# Altium PCB RF-UNIT-SPLIT.PcbDoc (part 1 of 2)
Units mm, origin at the board's own origin, x right, y up, seen from the top; angles counter-clockwise.
Board outline 99.88 x 99.9 mm, 2 copper layers (Top Layer, Bottom Layer), stack 1.671 mm thick; 85 components, 98 nets, 425 pads, 1878 vias.
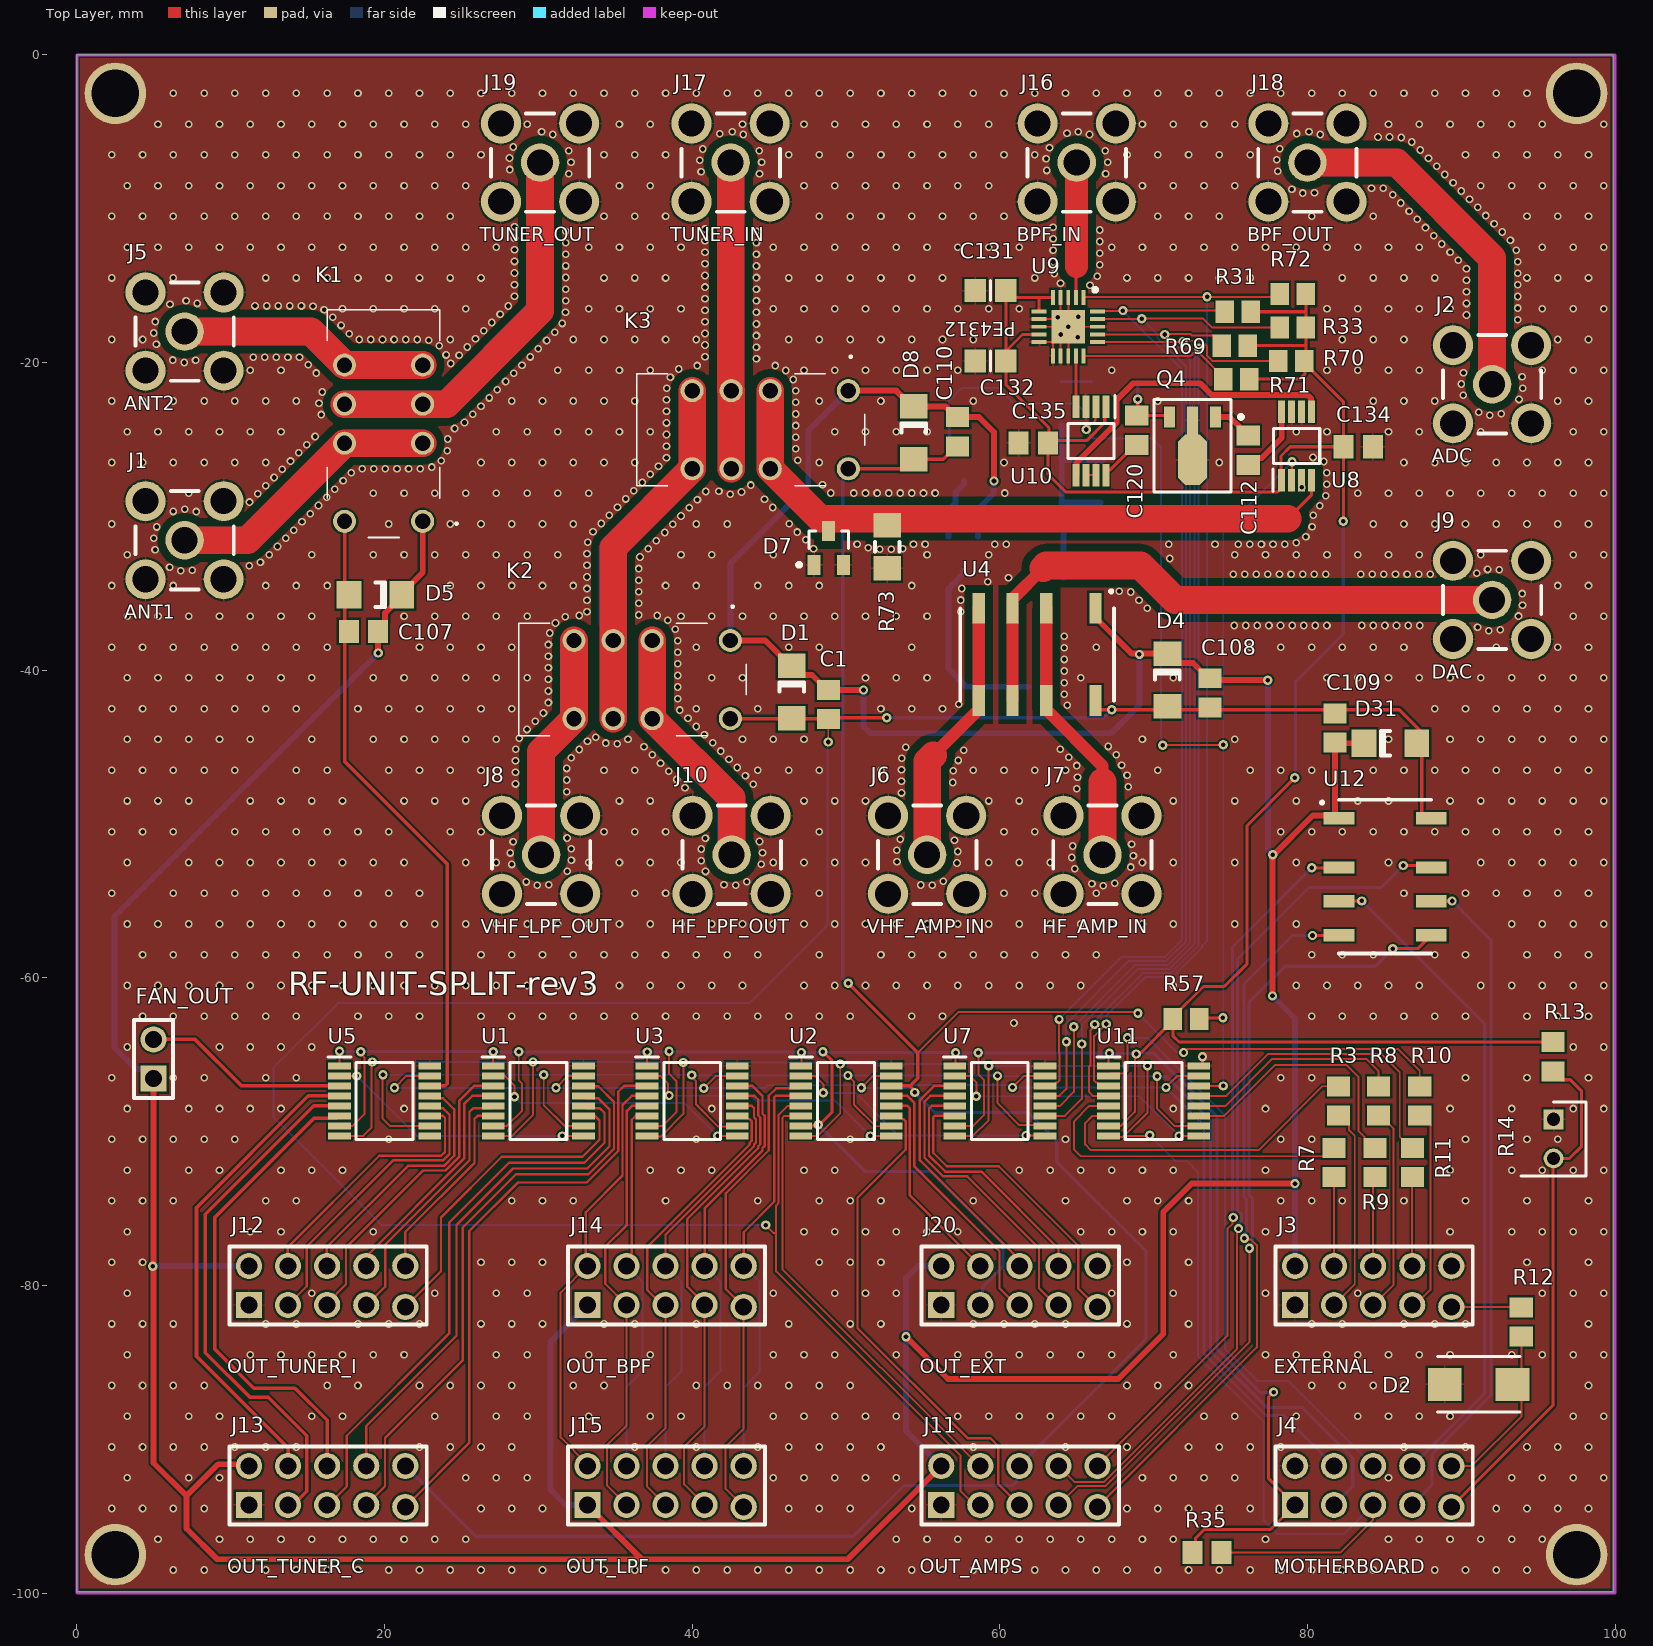
[diagram p0: Top Layer view]
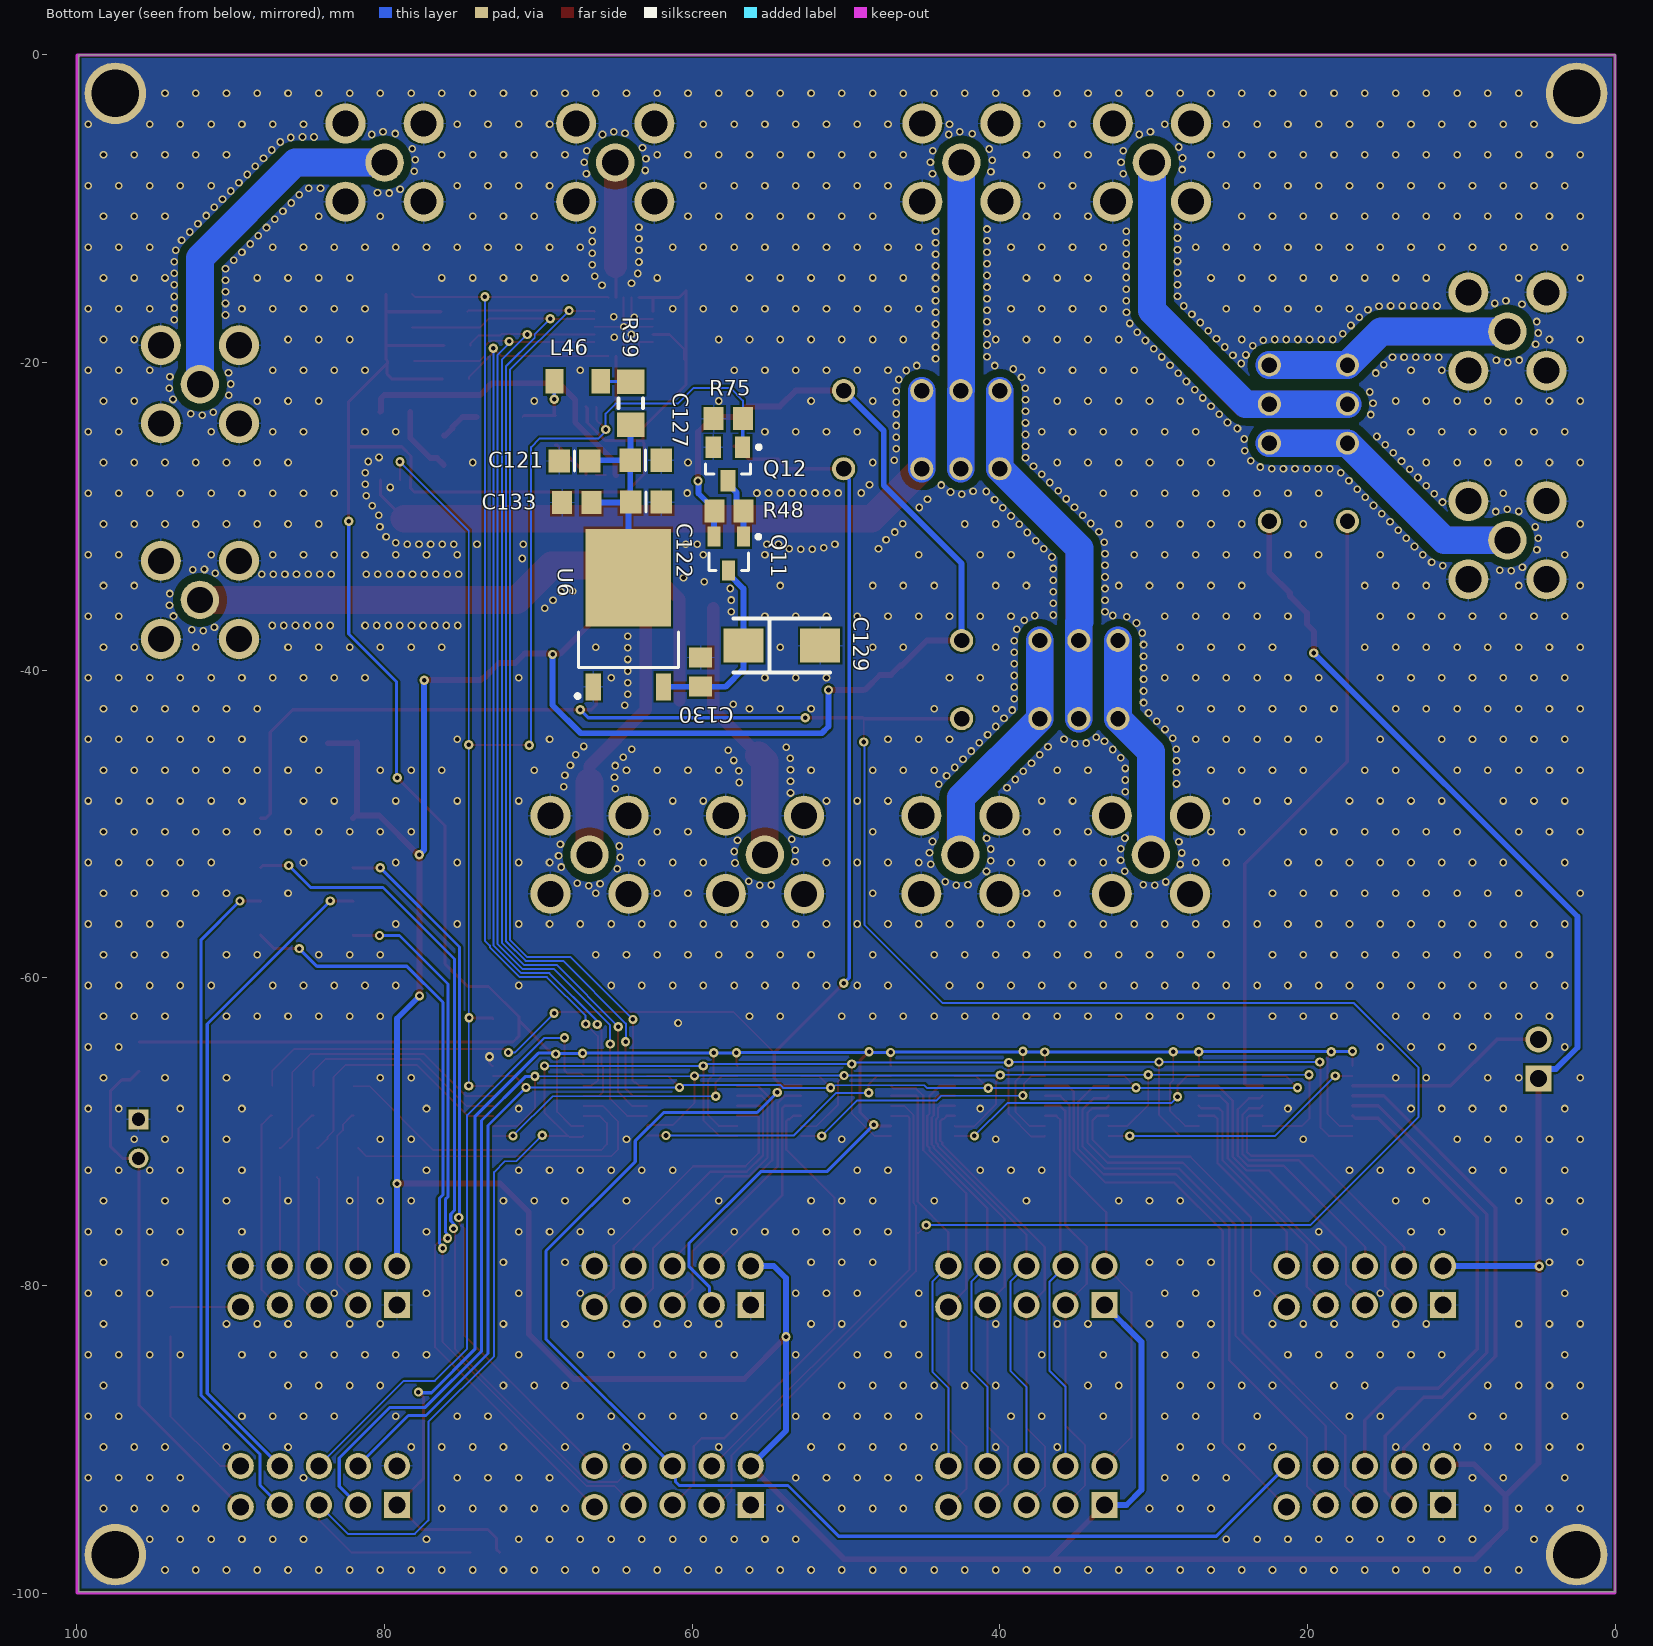
[diagram p1: Bottom Layer view, seen from below]

## Layer stack, top to bottom
Top Solder: solder mask 0.0102, Solder Resist, Dk 3.5
Top Layer: signal copper 0.0356
Dielectric 1: dielectric 1.6, FR-4, Dk 4.8
Bottom Layer: signal copper 0.0356
Bottom Solder: solder mask 0.0102, Solder Resist, Dk 3.5

## Board outline
0,-99.9 99.875,-99.9 99.875,0 0,0

## Design rules (kind name [scope] priority, off if disabled: settings)
BoardOutlineClearance [All] p1: gap=0.2 ignorepadtopadclearanceinfootprint=FALSE
Clearance Clearance-zazor [InNetClass('ZAZOR')] p1: gap=0.5 ignorepadtopadclearanceinfootprint=FALSE
Clearance [All] p2: gap=0.127 ignorepadtopadclearanceinfootprint=FALSE except(0.25: Arc-Hole Track-Hole SMDPad-Hole THPad-Hole Via-Hole Fill-Hole Poly-Hole Region-Hole Text-Hole)
ComponentClearance [All] p1: gap=0.127 collisioncheckmode=3 verticalgap=0.127 showdistances=TRUE
DiffPairsRouting [All] p1: maxlimit=0.254 minlimit=0.127 mostfreqgap=0.127 toplayer_minwidth=0.127 toplayer_maxwidth=25.4 toplayer_prefwidth=0.127 bottomlayer_minwidth=0.127 bottomlayer_maxwidth=25.4 bottomlayer_prefwidth=0.127 maxuncoupledlength=12.7
Height [All] p1: minheight=0 maxheight=1816.048 prefheight=12.7
HoleSize [All] p1: absolutevalues=TRUE maxlimit=6.3 minlimit=0.3 maxpercent=80.000 minpercent=20.000
HoleToHoleClearance [All] p1: gap=0.25 allowstackedmicrovias=FALSE
MinimumAnnularRing [All] p1: minimumring=0.076
MinimumSolderMaskSliver [All] p1: minsoldermaskwidth=0
PlaneClearance [All] p1: clearance=0.127
PlaneConnect PlaneConnectPowerPads [InPadClass('PowerPads')] p1: planeconnectstyle=Direct reliefexpansion=0.508 reliefentries=4 reliefconductorwidth=0.254 reliefairgap=0.254
PlaneConnect [All] p2: pad.planeconnectstyle=Relief pad.reliefexpansion=0.3 pad.reliefentries=4 pad.reliefconductorwidth=0.127 pad.reliefairgap=0.127 via.planeconnectstyle=Direct via.reliefexpansion=0.3 via.reliefentries=4 via.reliefconductorwidth=0.127 via.reliefairgap=0.127
PolygonConnect PolygonConnectPowerPads [All vs (InPadClass('PowerPads'))] p1: connectstyle=Direct reliefconductorwidth=0.254 reliefentries=4 polygonreliefangle="90 Angle" airgapwidth=0.254
PolygonConnect [All] p2: thpad.connectstyle=Relief thpad.reliefconductorwidth=0.127 thpad.reliefentries=4 thpad.polygonreliefangle="90 Angle" thpad.airgapwidth=0.127 smdpad.connectstyle=Relief smdpad.reliefconductorwidth=0.127 smdpad.reliefentries=4 smdpad.polygonreliefangle="90 Angle" smdpad.airgapwidth=0.127 via.connectstyle=Direct via.reliefconductorwidth=0.127 via.reliefentries=4 via.polygonreliefangle="90 Angle" via.airgapwidth=0.127
RoomDefinition U_CONTROL [InComponentClass('U_CONTROL')] p1: confinementstyle=ConfineIn formatcopy=TRUE lockcomponents=FALSE outline -57.729,-128.5 -6.929,-128.5 -6.929,-103.1 -57.729,-103.1
RoomDefinition U_CONN [InComponentClass('U_CONN')] p2: confinementstyle=ConfineIn formatcopy=TRUE lockcomponents=FALSE outline -57.729,-128.5 -6.929,-128.5 -6.929,-103.1 -57.729,-103.1
RoomDefinition U_LNA [InComponentClass('U_LNA')] p3: confinementstyle=ConfineIn formatcopy=TRUE lockcomponents=FALSE outline -57.729,-128.5 -6.929,-128.5 -6.929,-103.1 -57.729,-103.1
RoutingVias [All] p1: holewidth=0.3 width=0.6 viastyle="Through Hole" minholewidth=0.3 minwidth=0.6 maxholewidth=0.6 maxwidth=6.6
SilkToSilkClearance [All] p1: silktosilkclearance=0
SilkToSolderMaskClearance [IsPad] p1: minsilkscreentomaskgap=0.127 clearancetoexposedcopper=TRUE
SolderMaskExpansion [All] p1: expansion=0.075 istentingtop=FALSE
Width [All] p1: maxlimit=25.4 minlimit=0.127 preferedwidth=0.127 minimp=50.000000 maximp=50.000000 favimp=50.000000
20 further rules are at their usual default settings.

## Classes and differential pairs
net class Zazor: ADC ANT_OUT NetJ1_5 NetJ5_5 NetJ6_5 NetJ7_5 NetJ8_5 NetJ9_5 NetJ10_5 RX_ATT_OUT RX_IN_LNA TUNER TX_AMP_OUT
component class U_LNA: C110 C112 C120 C121 C122 C127 C129 C130 C131 C132 C133 C134 C135 D7 D8 J16 J17 J18 J19 K3 L46 Q4 Q11 Q12 R39 R48 R73 R75 U6 U8 U9 U10
component class U_CONTROL: C1 D1 FAN_OUT J8 J10 J11 J12 J13 J14 J15 J20 K2 R13 R14 R31 R33 R35 R57 R69 R70 R71 R72 U1 U2 U3 U5 U7 U11
component class U_CONN: C107 C108 C109 D2 D4 D5 D31 J1 J2 J3 J4 J5 J6 J7 J9 K1 R3 R7 R8 R9 R10 R11 R12 U4 U12

## Components (designator, comment, footprint, x,y, rotation, side; value= is the part's Value field where it differs from the comment)
C1 "100n" CAP_0805 48.85,-42.425 r90 top
C107 "100n" CAP_0805 18.425,-37.475 r0 top
C108 "100n" CAP_0805 73.65,-41.675 r90 top
C109 "100n" CAP_0805 81.8,-43.55 r270 top
C110 "100n" CAP_0805 57.25,-24.7 r90 top
C112 "1n" CAP_0805 76.15,-25.5 r270 top
C120 "1n" CAP_0805 68.9,-24.6 r90 top
C121 "10n" 6-0805_M 67.652,-26.4 r180 bottom
C122 "1n" 6-0805_M 63,-29.08 r0 bottom
C127 "100p" 6-0805_M 63.025,-26.352 r0 bottom
C129 "10uF 25V" CAPAE_5.3x5.3h6.1 54.175,-38.4 r180 bottom
C130 "100n" CAP_0805 59.45,-39.925 r270 bottom
C131 "100n" 6-0805_M 59.398,-15.325 r0 top
C132 "100p" 6-0805_M 59.398,-19.9 r0 top
C133 "100n" CAP_0805 67.7,-29.1 r180 bottom
C134 "100n" CAP_0805 83.5,-25.475 r180 top
C135 "100n" CAP_0805 61.975,-25.225 r0 top
D1 "1N4148" SS14 46.475,-41.1 r270 top
D2 "SMAJ5.0A-TR" SMBJ36CATR 91.125,-86.427 r180 top
D4 "1N4148" SS14 70.9,-40.325 r270 top
D5 "1N4148" SS14 19.725,-35.1 r180 top
D7 "BAV99" SOT23 48.875,-32.05 r0 top
D8 "1N4148" SS14 54.4,-24.25 r270 top
D31 "1N4148" SS14 85.075,-44.75 r0 top
FAN_OUT "51022-0200" 51022-0200 4.35,-65.275 r90 top
J1 "ANT1" 31-5431 7,-31.55 r0 top
J2 "ADC" 31-5431 92,-21.415 r0 top
J3 "EXTERNAL" 90131-0126 83,-80 r0 top
J4 "MOTHERBOARD" 90131-0126 83,-93 r0 top
J5 "ANT2" 31-5431 7,-17.985 r0 top
J6 "VHF_AMP_IN" 31-5431 55.275,-52 r0 top
J7 "HF_AMP_IN" 31-5431 66.675,-52 r0 top
J8 "VHF_LPF_OUT" 31-5431 30.175,-52 r0 top
J9 "DAC" 31-5431 92,-35.435 r0 top
J10 "HF_LPF_OUT" 31-5431 42.565,-52 r0 top
J11 "OUT_AMPS" 90131-0126 60,-93 r0 top
J12 "OUT_TUNER_I" 90131-0126 15,-80 r0 top
J13 "OUT_TUNER_C" 90131-0126 15,-93 r0 top
J14 "OUT_BPF" 90131-0126 37,-80 r0 top
J15 "OUT_LPF" 90131-0126 37,-93 r0 top
J16 "BPF_IN" 31-5431 65,-7 r0 top
J17 "TUNER_IN" 31-5431 42.5,-7 r0 top
J18 "BPF_OUT" 31-5431 80,-7 r0 top
J19 "TUNER_OUT" 31-5431 30.11,-7 r0 top
J20 "OUT_EXT" 90131-0126 60,-80 r0 top
K1 "G6S-2-DC12" G6S2DC12#1 22.48,-30.325 r90 top
K2 "G6S-2-DC12" G6S2DC12#2 42.48,-38.07 r180 top
K3 "G6S-2-DC12" G6S2DC12#2 50.155,-21.825 r180 top
L46 "220nH" IND_1206 67.45,-21.225 r0 bottom
Q4 "PGA-103+ / SPF5189Z" SOT89 72.525,-24.925 r180 top
Q11 "IRLML9301" SOT23 57.625,-32.425 r0 bottom
Q12 "BSS123" FAIR-SOT23-3_V 57.675,-26.6 r0 bottom
R3 "560" RES_0805 82.025,-68 r90 top
R7 "560" RES_0805 81.725,-72 r90 top
R8 "560" RES_0805 84.625,-68 r90 top
R9 "560" RES_0805 84.4,-72 r90 top
R10 "560" RES_0805 87.3,-68 r90 top
R11 "560" RES_0805 86.825,-72 r90 top
R12 "560" RES_0805 93.9,-82.375 r270 top
R13 "2k" RES_0805 95.975,-65.125 r90 top
R14 "KTY81/120" TO254P420X460X770-2P 96,-69.2 r270 top
R31 "1k" RESC2013X60X40NL20T25 75.475,-16.7 r0 top
R33 "1k" RESC2013X60X40NL20T25 79.052,-17.725 r0 top
R35 "1k" RES_0805 73.475,-97.35 r0 top
R39 "18" RES_1206 64,-22.65 r90 bottom
R48 "30k" RES_0805 57.6,-29.648 r0 bottom
R57 "1k" RESC2013X60X40NL20T25 72.1,-62.675 r180 top
R69 "1k" RESC2013X60X40NL20T25 75.275,-18.9 r0 top
R70 "1k" RESC2013X60X40NL20T25 78.95,-19.902 r0 top
R71 "1k" RESC2013X60X40NL20T25 75.373,-21.077 r0 top
R72 "1k" RESC2013X60X40NL20T25 79.052,-15.548 r0 top
R73 "10k" RES_1206 52.675,-31.975 r90 top
R75 "30k" RES_0805 57.65,-23.65 r180 bottom
U1 "STPIC6C595TTR" SOP65P640X120-16N#1 30,-68 r0 top
U2 "STPIC6C595TTR" SOP65P640X120-16N#1 50,-68 r0 top
U3 "STPIC6C595TTR" SOP65P640X120-16N#1 40,-68 r0 top
U4 "Axicom IM06" IM06GR 62.425,-38.975 r180 top
U5 "STPIC6C595TTR" SOP65P640X120-16N#2 20,-68 r0 top
U6 "LM1117DT-5.0" TO228P991X238-3N 64.15,-36.382 r90 bottom
U7 "STPIC6C595TTR" SOP65P640X120-16N#1 60,-68 r0 top
U8 "ADG918BRMZ" SOP65P490X110-8N 79.3,-25.425 r90 top
U9 "PE4312" QFN50P400X400X90-21N 64.45,-17.675 r270 top
U10 "ADG918BRMZ" SOP65P490X110-8N 65.925,-25.1 r270 top
U11 "STPIC6C595TTR" SOP65P640X120-16N#1 70,-68 r0 top
U12 "Axicom IM06" IM06GR 85.05,-53.425 r270 top

## Footprints (in the part's own frame and the unit in brackets; to place one, negate y for a bottom-side part, rotate by r counter-clockwise, add the part's x,y. Pads: shape width x height; smd on the part's side, far side on the other; paste and mask are expansions set on the pad)
6-0805_M [mm] "Chip Resistor, Body 2.0x1.2mm, IPC Low Density"
  rect 1.4x1.5 smd: 1(-1,0) 2(1,0)
  silkscreen extent 0,-0.65 0,0.65, body extent -1.07,-0.7 1.07,0.7, height 0.7
31-5431 [mm]
  round 2.6 hole 1.7: 1(-2.54,-2.54) 2(2.54,-2.54) 3(2.54,2.54) 4(-2.54,2.54)
  round 2.5 hole 1.7: 5(0,0)
  silkscreen extent -3.2,-3.2 3.2,3.2
51022-0200 [mm]
  rect 1.7x1.7 hole 1.1: 1(-1.27,-0.635)
  round 1.7 hole 1.1: 2(1.27,-0.635)
  silkscreen extent -2.54,-1.91 2.54,0.64
90131-0126 [mm]
  rect 1.7x1.7 hole 1.1: 1(-3.81,-1.27)
  round 1.7 hole 1.1: 2(-3.81,1.27) 3(-1.27,-1.27) 4(-1.27,1.27) 5(1.27,-1.27) 6(1.27,1.27) 7(3.81,-1.27) 8(3.81,1.27) 9(6.35,-1.397) 10(6.35,1.27)
  silkscreen extent -5.08,-2.54 7.75,2.54
CAP_0805 [mm]
  rect 1.3x1.5 smd: 1(-0.75,0) 2(1.15,0)
CAPAE_5.3x5.3h6.1 [mm]
  rect 2.6x2.2 smd: 1(-2.5,0) 2(2.5,0)
  silkscreen extent -3.15,-1.75 3.15,1.75
FAIR-SOT23-3_V [mm] "SOT23, 3-Leads, Body 2.92x1.3mm, Pitch 0.95mm"
  rect 1x1.4 smd: 1(-0.95,-1.1) 2(0.95,-1.1) 3(0,1.1)
  silkscreen extent -2.12,-1.22 1.46,0.65, body extent -1.46,-0.65 1.46,0.65, height 1.2
G6S2DC12#1 [mm]
  round 1.5 hole 1: 1(0,0) 3(5.08,0) 4(7.62,0) 5(10.16,0) 8(10.16,5.08) 9(7.62,5.08) 10(5.08,5.08)
  round 1.5 hole 1 mask+0.075: 12(0,5.08)
  silkscreen extent -1.05,-2.25 13.75,6.19, body extent -1.05,-1.11 13.75,6.19, height 9.5
G6S2DC12#2 [mm]
  round 1.5 hole 1: 1(0,0) 3(5.08,0) 4(7.62,0) 5(10.16,0) 8(10.16,5.08) 9(7.62,5.08) 10(5.08,5.08) 12(0,5.08)
  silkscreen extent -1.05,-2.25 13.75,6.19, body extent -1.05,-1.11 13.75,6.19, height 9.5
IM06GR [mm]
  rect 0.8x2 smd: 1(-3.8,-3) 2(-0.6,-3) 3(1.6,-3) 4(3.8,-3) 5(3.8,3) 6(1.6,3) 7(-0.6,3) 8(-3.8,3)
  silkscreen extent -5,-4.17 5,3
IND_1206 [mm]
  rect 1.2x1.6 smd: 1(-1.5,0) 2(1.5,0)
QFN50P400X400X90-21N [mm]
  rect 1x0.25 smd: 1(-1.9,1) 2(-1.9,0.5) 3(-1.9,0) 4(-1.9,-0.5) 5(-1.9,-1) 11(1.9,-1) 12(1.9,-0.5) 13(1.9,0) 14(1.9,0.5) 15(1.9,1)
  rect 0.25x1 smd: 6(-1,-1.9) 7(-0.5,-1.9) 8(0,-1.9) 9(0.5,-1.9) 10(1,-1.9) 16(1,1.9) 17(0.5,1.9) 18(0,1.9) 19(-0.5,1.9) 20(-1,1.9)
  rect 2.2x2.2 smd: 21(0,0)
  silkscreen extent -2.52,1.63 -2.28,1.88, body extent -2.05,-2.05 2.05,2.05, height 0.9
RES_0805 [mm]
  rect 1.3x1.5 smd: 1(-0.95,0) 2(0.95,0)
RES_1206 [mm]
  rect 1.6x1.8 smd: 1(-1.4,0) 2(1.4,0)
  silkscreen extent -0.3,-0.8 0.3,0.8
RESC2013X60X40NL20T25 [mm] "Chip Resistor, 2-Leads, Body 2.00x1.25mm, IPC Medium Density"
  rect 1.2x1.45 smd: 1(-0.85,0) 2(0.85,0)
  body extent -1.1,-0.72 1.1,0.72, height 0.6
SMBJ36CATR [mm]
  rect 2.2x2.15 smd: 1(-2.2,0) 2(2.2,0)
  silkscreen extent -2.68,-1.81 2.67,1.81, body extent -3.08,-1.81 3.09,1.81, height 2.75
SOP65P490X110-8N [mm]
  rect 1.45x0.45 smd: 1(-2.225,0.975) 2(-2.225,0.325) 3(-2.225,-0.325) 4(-2.225,-0.975) 5(2.225,-0.975) 6(2.225,-0.325) 7(2.225,0.325) 8(2.225,0.975)
  silkscreen extent -2.95,-1.5 1.15,1.55, body extent -2.45,-1.5 2.45,1.5, height 1.1
SOP65P640X120-16N#1 [mm]
  rect 1.48x0.45 smd: 1(-2.935,2.275) 2(-2.935,1.625) 3(-2.935,0.975) 4(-2.935,0.325) 5(-2.935,-0.325) 6(-2.935,-0.975) 7(-2.935,-1.625) 8(-2.935,-2.275) 9(2.935,-2.275) 10(2.935,-1.625) 11(2.935,-0.975) 12(2.935,-0.325) 13(2.935,0.325) 14(2.935,0.975) 15(2.935,1.625) 16(2.935,2.275)
  silkscreen extent -3.67,-2.5 1.85,2.85, body extent -3.2,-2.5 3.2,2.5, height 1.2
SOP65P640X120-16N#2 [mm]
  rect 1.48x0.45 smd: 1(-2.935,2.275) 2(-2.935,1.625) 3(-2.935,0.975) 4(-2.935,0.325) 5(-2.935,-0.325) 6(-2.935,-0.975) 7(-2.935,-1.625) 8(-2.935,-2.275) 9(2.935,-2.275) 10(2.935,-1.625) 11(2.935,-0.975) 12(2.935,-0.325) 14(2.935,0.975) 15(2.935,1.625) 16(2.935,2.275)
  rect 1.48x0.45 smd mask+0.075: 13(2.935,0.325)
  silkscreen extent -3.67,-2.5 1.85,2.85, body extent -3.2,-2.5 3.2,2.5, height 1.2
SOT23 [mm] "SOT-23; 3 Leads; Body 3.0 x 2.6 mm, inc. leads (LxW max)"
  rect 0.85x1.3 smd: 1(-0.95,-1.1) 2(0.95,-1.1) 3(0,1.1)
  silkscreen extent -2.05,-1.22 1.28,1.1
SOT89 [mm] "SOT-89; Body 4.6 x 4.25 mm, inc. leads (LxW max)"
  oct 1.9x3.3 smd: 0(0,1.388)
  rect 0.7x1.35 smd: 1(-1.5,-1.388) 3(1.5,-1.388)
  rect 0.7x1.8 smd: 2(0,-1.162)
  silkscreen extent -3.28,-2.51 2.5,3.49
SS14 [mm]
  rect 1.6x1.8 smd: 1(-1.4,0) 2(2.032,0)
  silkscreen extent -0.3,-0.8 0.3,0.8
TO228P991X238-3N [mm]
  rect 1.75x1 smd: 1(-4.7,2.285) 3(-4.7,-2.285)
  rect 6.35x5.55 smd: 4(2.4,0)
  silkscreen extent -5.42,-3.25 -1.15,3.43
TO254P420X460X770-2P [mm]
  rect 1.29x1.29 hole 0.86: 1(0,0)
  round 1.29 hole 0.86: 2(2.54,0)
  silkscreen extent -1.13,-2.1 3.67,2.1, body extent -1.03,-2.1 3.57,2.1, height 7.6

## Part data
C1 C107 C108 C109 C110 C112 C120 C121 C122 C127 C130 C131 C132 C133 C134 C135: library part CAP_0805, "CAP_0805"
C129: library part CAPAE_5.3x5.3h6.1, "CAPAE_5.3x5.3h6.1"
D2: library part SMLVT3V3, "Diode", Manufacturer_Name=STMicroelectronics, Mouser Part Number=511-SMLVT3V3, RS Part Number=5444821P, Allied_Number=70013736, Allied Price/Stock=http://www.alliedelec.com/stmicroelectronics-smlvt3v3/70013736/, Datasheet Link=http://www.st.com/web/en/resource/technical/document/datasheet/CD00000923.pdf, Height=2.65mm, Manufacturer_Part_Number=SMLVT3V3, Mouser Price/Stock=https://www.mouser.com/Search/Refine.aspx?Keyword=511-SMLVT3V3, RS Price/Stock=http://uk.rs-online.com/web/p/products/5444821P
J1 J2 J5 J6 J7 J8 J9 J10 J16 J17 J18 J19: library part 31-5431, "SMA"
J3 J4: library part 90131-0126, "2*5 PIN"
J11 J12 J13 J14 J15 J20: library part 90131-0126_1_1, "2*5 PIN"
K1 K2 K3: "Relay or Contactor", Manufacturer_Name="Omron Electronics", Mouser Part Number=653-G6S-2-DC12A, Datasheet Link=https://componentsearchengine.com/Datasheets/1/G6S-2-DC12.pdf, Height=9.4mm, Manufacturer_Part_Number=G6S-2-DC12, Mouser Price/Stock=https://www.mouser.co.uk/ProductDetail/Omron-Electronics/G6S-2-DC12/?qs=QGk6feVlqMLN9Ouv0QsFzA%3D%3D
L46: library part IND_1206, "IND_1206"
Q4: library part PGA-103+
Q11: library part MOSFET_ENH_PD, "MOSFET"
Q12: library part CMP-2000-04934-1, "N-Channel Logic Level Enhancement Mode Field Effect Transistor, 1.7 V, -55 to 150 degC, 3-Pin SOT-23, RoHS, Tape and Reel", Manufacturer=Fairchild, Maximum Continuous Drain Current=0.17A, Maximum Drain Source Voltage=100V, Maximum Gate Source Voltage=±20V, Operating Temperature=-55to150degC, Package=3SOT-23, Package Description="3-Pin Small Outline Transistor, Body 2.92 x 1.325 mm, Pitch 0.95 mm", Package Reference=SOT23-3, Package Version="Rev. 12, 03/2016", Category=MOSFET, Channel Mode=Enhancement, Channel Type=N, Datasheet URL=https://www.fairchildsemi.com/datasheets/BS/BSS123.pdf, Datasheet Version=Jun-03, Manufacturer URL=https://www.fairchildsemi.com/, Mounting=SurfaceMount, Package URL=http://www.fairchildsemi.com/dwg/MA/MA03D.pdf, Packaging=Tape&Reel, Rad Hard=No, RDS-on=6000@10VmOhm, Typical Fall Time=2.4ns, Typical Rise Time=9ns, Typical Turn-Off Delay Time=17ns, Typical Turn-On Delay Time=1.7ns
R3 R7 R8 R9 R10 R11 R12 R13 R35 R48 R75: library part RES_0805, "RES_0805"
R14: library part KTY81_110, "Integrated Circuit", Manufacturer_Name=Nexperia, Manufacturer_Part_Number=KTY81/110, Datasheet Link=https://www.nxp.com/docs/en/data-sheet/KTY81_SER.pdf, Height=4.2mm
R31 R33 R57 R69 R70 R71 R72: library part CMP-2001-00626-1, "RES_0805", Manufacturer=Panasonic, Part Number=ERA-6AEB303V
R39 R73: library part RES_1206, "RES_1206"
U1 U2 U3 U5 U7 U11: "Integrated Circuit", Manufacturer_Name=STMicroelectronics, Mouser Part Number=511-STPIC6C595T, Arrow Part Number=STPIC6C595TTR, Arrow Price/Stock=https://www.arrow.com/en/products/stpic6c595ttr/stmicroelectronics, Datasheet Link=http://www.st.com/st-web-ui/static/active/en/resource/technical/document/datasheet/CD00020664.pdf, Height=1.2mm, Manufacturer_Part_Number=STPIC6C595TTR, Mouser Price/Stock=https://www.mouser.co.uk/ProductDetail/STMicroelectronics/STPIC6C595TTR?qs=Pgvhs884FskRYYZkj3y%2FSg%3D%3D
U6: library part LM1117DT-ADJ, "Integrated Circuit", Manufacturer_Name="Texas Instruments", Mouser Part Number=926-LM1117DT-ADJ, Datasheet Link=http://www.ti.com/lit/ds/symlink/lm1117-n.pdf, Height=2.38mm, Manufacturer_Part_Number=LM1117DT-ADJ, Mouser Price/Stock=https://www.mouser.com/Search/Refine.aspx?Keyword=926-LM1117DT-ADJ
U8 U10: "Integrated Circuit", Manufacturer_Name="Analog Devices", Mouser Part Number=584-ADG918BRMZ, RS Part Number=4969212P, Datasheet Link=http://www.analog.com/static/imported-files/data_sheets/ADG918_919.pdf, Height=1.1mm, Manufacturer_Part_Number=ADG918BRMZ, Mouser Price/Stock=https://www.mouser.co.uk/ProductDetail/Analog-Devices/ADG918BRMZ?qs=BpaRKvA4VqHrp1TCwMhfnw%3D%3D, RS Price/Stock=http://uk.rs-online.com/web/p/products/4969212P
U9: library part PE4312C-Z, "Integrated Circuit", Manufacturer_Name=pSemi, Mouser Part Number=N/A, Datasheet Link=https://www.psemi.com/pdf/datasheets/pe4312ds.pdf, Height=0.9mm, Manufacturer_Part_Number=PE4312C-Z, Mouser Price/Stock=https://www.mouser.com/Search/Refine.aspx?Keyword=N%2FA

## Free pads (board coordinates)
  round 4 hole 3.1: 6(2.5,-97.5) 6(2.5,-2.5) 6(97.5,-97.5) 6(97.5,-2.5)

## Via types
v1: diameter 0.5, hole 0.3, Top Layer to Bottom Layer, tented both sides, 1784 vias
v2: diameter 0.6, hole 0.3, Top Layer to Bottom Layer, tented both sides, 57 vias
v3: diameter 0.6, hole 0.3, Top Layer to Bottom Layer, 37 vias

## Nets (pads, with @x,y where several pads share a name; then routed paths per layer and width w, separated by ;. In a path a pad name is that pad's centre, name@x,y a point inside that pad or via, vN(x,y) a via of type N, cw(c..) or ccw(c..) an arc to the next point about the centre after c; other vN are vias at no path point)
+3V3: C131.2 C132.2 C134.2 C135.2 J4.1 J20.3 R13.2 R31.2 R33.2 R35.1 R57.2 R69.2 R70.2 R71.2 R72.2 U1.1 U1.7 U2.1 U2.7 U3.1 U3.7 U5.1 U5.7 U7.1 U7.7 U8.1 U9.5 U9.6 U9.9 U10.1 U11.1 U11.7 | length 300.9
  Top Layer w0.127: U5.7@17.065,-69.625 17.925,-69.625 18.69,-68.86 18.69,-65.168 18.45,-64.928 v2(18.45,-64.8) ; U5.1@17.065,-65.725 17.075,-65.715 v2(17.075,-64.775) ; U1.7@27.065,-69.625 27.95,-69.625 28.94,-68.635 28.94,-66.889 28.725,-66.673 v2(28.725,-64.8) ; U1.1@27.065,-65.725 27.065,-64.81 v2(27.075,-64.8) ; U3.7@37.065,-69.625 38.075,-69.625 38.99,-68.709 38.99,-66.74 38.5,-66.25 v2(38.5,-64.775) ; U3.1@37.065,-65.725 37.075,-65.715 v2(37.075,-64.825) ; U2.1@47.065,-65.725 47.1,-65.69 v2(47.1,-64.85) ; U7.7@57.065,-69.625 58.275,-69.625 58.966,-68.935 58.966,-66.64 58.6,-66.275 v2(58.6,-64.875) ; U7.1@57.065,-65.725 57.125,-65.665 v2(57.125,-64.875) ; U11.7@67.065,-69.625 67.878,-69.625 68.783,-68.721 68.783,-65.042 v2(68.875,-64.95) 68.966,-64.859 69.191,-64.859 ; U11.1@67.065,-65.725 67.065,-64.96 v2(67.125,-64.9)
  Top Layer w0.2: U2.7@47.065,-69.625 v3@48.2,-69.625 ; v3@48.239,-69.586 49.1,-68.725 49.1,-65.4 v2(48.5,-64.8) ; U9.9@62.55,-18.175 61.475,-18.175 60.5,-19.15 60.5,-19.798 C132.2@60.398,-19.9 ; U9.6@62.55,-16.675 62.55,-15.825 62.6,-15.775 ; U9.5@63.45,-15.775 62.6,-15.775 ; U10.1@66.9,-22.875 66.82,-22.955 66.82,-23.9 65.645,-25.075 63.275,-25.075 C135.2@63.2,-25.15 ; 69.191,-64.859 R57.2@71.25,-62.8 ; R35.1@72.525,-97.35 72.733,-97.142 72.733,-96.417 73.29,-95.86 77.6,-95.86 J4.1@79.19,-94.27 78.084,-93.164 77.475,-92.555 77.475,-87.249 77.792,-86.932 v3(77.798,-86.932) ; R69.2@76.125,-18.9 79.765,-18.9 79.902,-18.762 ; R71.2@76.223,-21.077 79.498,-21.077 79.85,-20.725 R70.2@79.85,-20.077 ; R31.2@76.325,-16.7 79.839,-16.7 79.902,-16.636 ; v3(79.175,-47) 76.075,-50.1 76.075,-59.075 74.588,-60.562 73.238,-60.562 71.25,-62.55 R57.2@71.25,-62.675 R57.2@71.25,-62.8 ; R70.2@79.8,-19.902 79.8,-20.027 R70.2@79.85,-20.077 ; R70.2@79.85,-19.902 79.85,-19.852 79.902,-19.8 79.902,-18.762 ; R72.2@79.902,-15.548 79.902,-16.636 ; v3(82.325,-30.325) 82.35,-30.3 C134.2@82.35,-25.475 ; R13.2@95.975,-64.175 71.65,-64.175 71.25,-63.775 R57.2@71.25,-62.8 ; C132.2@60.398,-19.9 60.398,-21.448 63.2,-24.25 C135.2@63.2,-25.15 ; C132.2@60.398,-19.9 C131.2@60.398,-15.325 60.848,-15.775 62.6,-15.775 ; C135.2@63.2,-25.15 C135.2@63.125,-25.225 63.125,-27.25 64.3,-28.425 78.05,-28.425 78.325,-28.15 U8.1@78.325,-27.65 78.275,-27.6 78.275,-26.075 78.875,-25.475 C134.2@82.35,-25.475 ; R70.2@79.85,-20.077 82.35,-22.577 C134.2@82.35,-25.475 ; 79.902,-18.762 R33.2@79.902,-17.725 79.902,-16.636
  Bottom Layer w0.2: v2(17.075,-64.775) 17.087,-64.788 18.438,-64.788 v2(18.45,-64.8) v2(27.075,-64.8) 27.1,-64.825 v2(37.075,-64.825) 47.075,-64.825 v2(47.1,-64.85) 57.1,-64.85 v2(57.125,-64.875) 57.137,-64.888 67.112,-64.888 67.15,-64.925 68.85,-64.925 v2(68.875,-64.95) 68.925,-64.9 70,-64.9 74.125,-69.025 74.125,-84.15 76.95,-86.975 77.8,-86.975 77.798,-86.973 v3(77.798,-86.932) ; v3(48.201,-69.548) 51.253,-72.6 55.55,-72.6 60.193,-77.243 60.193,-78.79 58.863,-80.12 58.863,-81.137 J20.3@58.73,-81.27 ; v3(79.175,-47) 79.225,-46.95 79.225,-40.75 82.325,-37.65 v3(82.325,-30.325)
+12: C1.2 C107.2 C108.2 C109.2 C110.2 D1.1 D4.1 D5.1 D8.1 D31.1 FAN_OUT.1 J3.2 J11.2 J12.2 J13.2 J14.1 J15.1 J20.2 K1.1 K2.1 K3.1 Q11.2 R48.2 U4.1 U12.1 | length 348.7
  Top Layer w0.381: FAN_OUT.1@4.985,-66.545 4.985,-91.535 7.125,-93.675 ; J13.2@11.19,-91.73 11.085,-91.625 9.175,-91.625 7.125,-93.675 ; v3(19.588,-38.88) 19.575,-38.867 C107.2@19.575,-37.475 20.035,-37.015 20.035,-36.29 21.125,-35.2 D5.1@21.125,-35.1 ; D5.1@21.173,-35.052 D5.1@21.125,-35.1 ; K1.1@22.48,-30.325 22.48,-33.645 21.125,-35 D5.1@21.125,-35.1 ; J15.1@33.19,-94.27 36.72,-97.8 ; K2.1@42.48,-38.07 44.745,-38.07 46.375,-39.7 D1.1@46.475,-39.7 47.085,-40.31 47.785,-40.31 48.75,-41.275 C1.2@48.85,-41.275 48.865,-41.289 v3(51.138,-41.289) ; K3.1@50.155,-21.825 53.275,-21.825 54.3,-22.85 D8.1@54.4,-22.85 56.45,-22.85 57.15,-23.55 C110.2@57.25,-23.55 58.65,-23.55 59.625,-24.525 v3(59.625,-27.7) ; v3(53.898,-83.338) 56.635,-86.075 67.7,-86.075 70.625,-83.15 70.625,-75.225 72.475,-73.375 v3(79.19,-73.375) ; J11.2@56.19,-91.73 50.12,-97.8 36.72,-97.8 ; U4.1@66.225,-35.975 66.225,-36.575 68.575,-38.925 D4.1@70.9,-38.925 71.51,-39.535 72.56,-39.535 73.55,-40.525 C108.2@73.65,-40.525 73.775,-40.65 v3(77.425,-40.65) ; v3(77.725,-61.175) v3@77.725,-52.075 ; v3@77.775,-52.025 80.35,-49.45 U12.1@81.834,-49.45 ; U12.1@82.05,-49.625 81.875,-49.45 U12.1@81.834,-49.45 ; D31.1@83.675,-44.75 81.85,-44.75 C109.2@81.8,-44.7 81.8,-49.415 U12.1@81.834,-49.45 ; 7.125,-93.675 7.125,-95.8 9.125,-97.8 36.72,-97.8
  Bottom Layer w0.381: v3(4.925,-78.75) 4.935,-78.74 11.18,-78.74 J12.2@11.19,-78.73 ; FAN_OUT.1@4.985,-66.545 4.37,-65.93 3.853,-65.93 2.45,-64.527 2.45,-56.018 v3(19.588,-38.88) ; J15.1@33.19,-94.27 31.77,-94.27 30.8,-93.3 30.8,-83.66 J14.1@33.19,-81.27 ; K2.1@42.48,-38.07 42.48,-33.07 47.55,-28 47.55,-24.43 K3.1@50.155,-21.825 ; v3(51.138,-41.289) 51.138,-43.663 51.575,-44.1 67.25,-44.1 69.075,-42.275 v3(69.075,-38.975) ; J11.2@56.19,-91.73 53.9,-89.44 53.9,-79.525 54.695,-78.73 J20.2@56.19,-78.73 ; Q11.2@58.575,-31.325 58.575,-29.673 R48.2@58.55,-29.648 58.55,-29.548 59.583,-28.515 59.583,-27.742 v3(59.625,-27.7) ; v3(77.425,-40.65) 77.425,-51.675 v3(77.75,-52) ; v3(77.725,-61.175) 79.19,-62.64 v3(79.19,-73.375) J3.2@79.19,-78.73
ADC: J2.5 J18.5 | length 45.6
  Top Layer w1.8: J18.5@80,-7 85.8,-7 92,-13.2 J2.5@92,-21.415
  Bottom Layer w1.8: J18.5@80,-7 85.8,-7 92,-13.2 J2.5@92,-21.415
ANT1-2_OUT: C107.1 D5.2 K1.12 U5.14 | length 40.5
  Top Layer w0.23: K1.12@17.4,-30.325 17.4,-45.925 24.075,-52.6 24.075,-59.35 24.075,-66.875 23.925,-67.025 U5.14@22.935,-67.025
ANT_OUT: J19.5 K1.4 K1.9 | length 49.7
  Top Layer w1.8: K1.9@17.4,-22.705 K1.4@22.48,-22.705 24.045,-22.705 30.11,-16.64 J19.5@30.11,-7
  Bottom Layer w1.8: K1.9@17.4,-22.705 24.02,-22.705 30.11,-16.615 J19.5@30.11,-7
ATT_ON_0.5: R31.1 U7.14 U9.20 | length 66
  Top Layer w0.127: U7.14@62.935,-67.025 63.45,-67.025 63.685,-66.791 63.754,-66.791 63.866,-66.679 63.866,-64.899 63.838,-64.871 63.838,-62.719 v2(63.853,-62.703) ; U9.20@66.35,-16.675 66.375,-16.65 67.975,-16.65 v2(68,-16.625) 74.55,-16.625 R31.1@74.625,-16.7
  Bottom Layer w0.127: v2(63.853,-62.703) 67.906,-58.65 70.726,-58.65 71.85,-57.526 71.85,-20.475 v2(68,-16.625)
ATT_ON_1: R33.1 U7.13 U9.19 | length 69.6
  Top Layer w0.127: U7.13@62.935,-67.675 63.875,-67.675 64.328,-67.222 v2(64.328,-64.153) ; U9.19@66.35,-17.175 69.2,-17.175 v2(69.225,-17.15) 73.222,-17.15 73.797,-17.725 R33.1@78.202,-17.725
  Bottom Layer w0.127: v2(64.328,-64.153) 64.31,-64.134 64.31,-62.972 68.377,-58.904 70.831,-58.904 72.104,-57.631 72.104,-20.248 70.235,-18.378 70.235,-18.16 v2(69.225,-17.15)
ATT_ON_2: R69.1 U7.12 U9.17 | length 65.1
  Top Layer w0.127: U7.12@62.935,-68.325 63.915,-68.325 64.819,-67.422 64.819,-63.194 v2(64.8,-63.175) ; U9.17@66.35,-18.175 v2(70.725,-18.175) 70.765,-18.135 72.364,-18.135 72.468,-18.239 73.888,-18.239 74.425,-18.775 R69.1@74.425,-18.9
  Bottom Layer w0.127: v2(64.8,-63.175) 68.817,-59.158 70.936,-59.158 72.375,-57.719 72.375,-19.825 v2(70.725,-18.175)
ATT_ON_4: R70.1 U7.11 U9.16 | length 69.3
  Top Layer w0.127: U7.11@62.935,-68.975 64.225,-68.975 65.328,-67.872 v2(65.328,-64.303) ; U9.16@66.35,-18.675 66.36,-18.665 71.86,-18.665 v2(71.9,-18.625) 71.94,-18.585 73.128,-18.585 73.481,-18.937 73.481,-19.55 73.833,-19.902 R70.1@78.1,-19.902
  Bottom Layer w0.127: v2(65.328,-64.303) 65.328,-63.084 69,-59.412 71.041,-59.412 72.65,-57.803 72.65,-19.494 71.9,-18.744 v2(71.9,-18.625)
ATT_ON_8: R71.1 U9.15 U11.4 | length 64.1
  Top Layer w0.127: U9.15@65.45,-19.575 72.425,-19.575 v2(72.925,-19.075) 73.016,-19.166 73.016,-19.445 74.523,-20.952 R71.1@74.523,-21.077 ; v2(66.178,-63.028) 66.178,-63.126 65.88,-63.424 65.88,-65.691 65.8,-65.772 65.8,-67.425 66.05,-67.675 U11.4@67.065,-67.675
  Bottom Layer w0.127: v2(66.178,-63.028) 66.234,-62.973 66.234,-62.741 69.279,-59.696 71.116,-59.696 72.904,-57.908 72.904,-19.096 v2(72.925,-19.075)
ATT_ON_16: R72.1 U9.1 U11.3 | length 69
  Top Layer w0.127: U9.1@65.45,-15.775 65.5,-15.725 v2(73.475,-15.725) 78.025,-15.725 R72.1@78.202,-15.548 ; v2(66.925,-63) 66.134,-63.791 66.134,-66.679 66.246,-66.791 66.315,-66.791 66.55,-67.025 U11.3@67.065,-67.025
  Bottom Layer w0.127: v2(66.925,-63) 66.925,-62.475 69.45,-59.95 71.221,-59.95 73.158,-58.014 73.158,-57.908 73.475,-57.591 v2(73.475,-15.725)
BAND_OUT_0: R11.2 U11.13 | length 20
  Top Layer w0.127: U11.13@72.935,-67.675 74.725,-67.675 77.45,-64.95 84.8,-64.95 86,-66.15 86,-70.325 86.725,-71.05 R11.2@86.825,-71.05
BAND_OUT_1: R3.2 U11.6 | length 21.4
  Top Layer w0.127: U11.6@67.065,-68.975 66.025,-68.975 65.55,-69.45 65.55,-70.825 65.925,-71.2 76.825,-71.2 80.975,-67.05 R3.2@82.025,-67.05
BAND_OUT_2: R9.2 U11.11 | length 17.2
  Top Layer w0.127: U11.11@72.935,-68.975 74.575,-68.975 77.875,-65.675 82.55,-65.675 83.325,-66.45 83.325,-69.975 83.713,-70.363 83.713,-70.463 84.3,-71.05 R9.2@84.4,-71.05
BAND_OUT_3: R8.2 U11.12 | length 14.3
  Top Layer w0.127: U11.12@72.935,-68.325 74.675,-68.325 77.725,-65.275 83.825,-65.275 84.625,-66.075 R8.2@84.625,-67.05
BPF_1: J14.2 J15.2 U3.4 | length 27.8
  Top Layer w0.127: J15.2@33.19,-91.73 33.19,-91.615 31.45,-89.875 31.45,-80.47 J14.2@33.19,-78.73
  Top Layer w0.15: J14.2@33.19,-78.73 33.075,-78.615 33.075,-75.25 35.475,-72.85 35.475,-68.275 36.075,-67.675 U3.4@37.065,-67.675
BPF_2: J14.3 J15.3 U3.5 | length 29.3
  Top Layer w0.127: J15.3@35.73,-94.27 34.45,-92.99 34.45,-90.4 35.73,-89.12 J14.3@35.73,-81.27
  Top Layer w0.15: J14.3@35.73,-81.27 34.35,-79.89 34.35,-77.475 35.754,-76.071 35.754,-68.65 36.079,-68.325 U3.5@37.065,-68.325
BPF_3: J14.4 J15.4 U3.6 | length 24.6
  Top Layer w0.15: J14.4@35.73,-78.73 36.027,-78.433 36.027,-77.916 36.075,-77.867 36.075,-69.233 36.333,-68.975 U3.6@37.065,-68.975
  Bottom Layer w0.127: J15.4@35.73,-91.73 35.73,-86.592 36.771,-85.551 36.771,-79.771 J14.4@35.73,-78.73
BPF_4: J14.5 J15.5 U3.11 | length 30.5
  Top Layer w0.127: J15.5@38.27,-94.27 37.05,-93.05 37.05,-90.475 38.27,-89.255 J14.5@38.27,-81.27
  Top Layer w0.15: J14.5@38.27,-81.27 38.045,-81.27 37.075,-80.3 37.075,-77.5 43.744,-70.831 43.744,-70.717 43.877,-70.584 43.877,-69.316 43.735,-69.175 43.65,-69.175 43.45,-68.975 U3.11@42.935,-68.975
BPF_5: J14.6 J15.6 U3.12 | length 27.8
  Top Layer w0.15: J14.6@38.27,-78.73 38.27,-76.697 44.021,-70.946 44.021,-70.831 44.154,-70.698 44.154,-69.202 44.021,-69.069 44.021,-68.471 43.875,-68.325 U3.12@42.935,-68.325
  Bottom Layer w0.127: J15.6@38.27,-91.73 38.27,-86.592 39.311,-85.551 39.311,-79.771 J14.6@38.27,-78.73
BPF_6: J14.7 J15.7 U3.13 | length 31.4
  Top Layer w0.127: J15.7@40.81,-94.27 39.475,-92.935 39.475,-90.475 40.81,-89.14 J14.7@40.81,-81.27
  Top Layer w0.15: J14.7@40.81,-81.27 40.81,-81.21 39.675,-80.075 39.675,-75.683 44.298,-71.06 44.298,-70.946 44.431,-70.813 44.431,-69.087 44.298,-68.954 44.298,-67.923 44.05,-67.675 U3.13@42.935,-67.675
BPF_7: J14.8 J15.8 U3.14 | length 28.5
  Top Layer w0.15: J14.8@40.81,-78.73 40.81,-74.99 44.575,-71.225 44.575,-71.061 44.708,-70.928 44.708,-68.972 44.575,-68.839 44.575,-67.675 43.925,-67.025 U3.14@42.935,-67.025
  Bottom Layer w0.127: J15.8@40.81,-91.73 40.81,-86.592 41.851,-85.551 41.851,-79.771 J14.8@40.81,-78.73
BPF_8: J14.9 J15.9 U2.3 | length 31.7
  Top Layer w0.127: J15.9@43.35,-94.397 42.175,-93.222 42.175,-90.475 43.35,-89.3 J14.9@43.35,-81.397
  Top Layer w0.15: J14.9@43.35,-81.397 43.347,-81.397 42.178,-80.228 42.178,-74.014 44.985,-71.207 44.985,-67.669 45.467,-67.187 46.903,-67.187 U2.3@47.065,-67.025
BPF_9: J14.10 J15.10 U2.4 | length 27.4
  Top Layer w0.15: J14.10@43.35,-78.73 43.35,-76.534 45.338,-74.546 45.338,-67.763 45.426,-67.675 U2.4@47.065,-67.675
  Bottom Layer w0.127: J15.10@43.35,-91.73 43.35,-86.655 44.391,-85.615 44.391,-79.771 J14.10@43.35,-78.73
CTRL_CLK: J4.4 U1.15 U2.15 U3.15 U5.15 U7.15 U11.15 | length 94.6
  Top Layer w0.127: v2(20.65,-67.15) 21.425,-66.375 U5.15@22.935,-66.375 ; v2(31.15,-67.15) 31.925,-66.375 U1.15@32.935,-66.375 ; v2(40.75,-67.175) 41.55,-66.375 U3.15@42.935,-66.375 ; v2(51,-67.15) 51.775,-66.375 U2.15@52.935,-66.375 ; v2(60.825,-67.125) 61.575,-66.375 U7.15@62.935,-66.375 ; v2(70.8,-67.125) 71.55,-66.375 U11.15@72.935,-66.375
  Bottom Layer w0.127: v2(20.65,-67.15) v2(31.15,-67.15) 31.16,-67.159 40.735,-67.159 v2(40.75,-67.175) 44.708,-67.175 44.898,-66.985 50.707,-66.985 50.872,-67.15 54.081,-67.15 54.272,-66.96 60.532,-66.96 60.697,-67.125 v2(70.8,-67.125)
  Bottom Layer w0.2: v2(70.8,-67.125) 73.275,-69.6 73.275,-84.425 77.3,-88.45 78.45,-88.45 J4.4@81.73,-91.73
CTRL_DATA: J4.6 U11.2 | length 39.9
  Top Layer w0.127: U11.2@67.065,-66.375 67.215,-66.225 68.1,-66.225 68.3,-66.025 v3(68.3,-63.9)
  Bottom Layer w0.127: v3(68.3,-63.9) 69.6,-63.9 74.625,-68.925 74.625,-84.1 76.725,-86.2 78.74,-86.2 J4.6@84.27,-91.73
CTRL_OE: J4.5 R35.2 U1.8 U2.8 U3.8 U5.8 U7.8 U11.8 | length 139.1
  Top Layer w0.127: U5.8@17.065,-70.275 18.625,-70.275 19.15,-69.75 19.15,-65.525 v2(19.2,-65.475) ; U1.8@27.065,-70.275 28.3,-70.275 29.65,-68.925 v2(29.65,-65.475) ; U3.8@37.065,-70.275 37.115,-70.325 37.95,-70.325 39.425,-68.85 v2(39.425,-65.5) ; U2.8@47.065,-70.275 48.15,-70.275 48.387,-70.038 48.404,-70.038 48.692,-69.751 48.692,-69.733 49.627,-68.798 v2(49.627,-65.6) ; U7.8@57.065,-70.275 58.25,-70.275 59.275,-69.25 v2(59.275,-65.725) ; U11.8@67.065,-70.275 67.15,-70.36 67.965,-70.36 68.05,-70.275 ; v2(69.6,-65.725) 69.6,-68.762 68.087,-70.275 68.05,-70.275 ; v3(69.74,-70.229) 69.694,-70.275 68.05,-70.275 ; R35.2@74.425,-97.35 82.15,-97.35 84.25,-95.25 84.25,-94.29 J4.5@84.27,-94.27
  Bottom Layer w0.127: v2(19.2,-65.475) v2(29.65,-65.475) 39.4,-65.475 v2(39.425,-65.5) 49.425,-65.5 49.525,-65.6 59.15,-65.6 v2(59.275,-65.725) v2(69.6,-65.725) ; v3(69.74,-70.229) 71.436,-71.925 72.175,-71.925 72.875,-72.625 72.875,-84.6 77.15,-88.875 77.15,-95.275 78.025,-96.15 82.39,-96.15 J4.5@84.27,-94.27
CTRL_RCLK: J4.3 U1.10 U2.10 U3.10 U5.10 U7.10 U11.10 | length 118.1
  Top Layer w0.127: v2(19.9,-66.3) 19.875,-66.325 19.875,-69.15 20.35,-69.625 U5.10@22.935,-69.625 ; v2(30.35,-66.3) 30.35,-68.275 31.7,-69.625 U1.10@32.935,-69.625 ; v2(39.975,-66.325) 39.975,-66.45 40.26,-66.734 40.26,-68.234 41.7,-69.675 42.885,-69.675 U3.10@42.935,-69.625 ; v2(50.125,-66.35) 50.51,-66.734 50.51,-68.234 51.925,-69.65 52.91,-69.65 U2.10@52.935,-69.625 ; v2(59.85,-66.375) 59.85,-68.15 61.275,-69.575 62.885,-69.575 U7.10@62.935,-69.625 ; v2(70.225,-66.4) 70.225,-68.5 71.35,-69.625 U11.10@72.935,-69.625
  Bottom Layer w0.127: v2(19.9,-66.3) v2(30.35,-66.3) 39.95,-66.3 v2(39.975,-66.325) 39.987,-66.338 50.113,-66.338 v2(50.125,-66.35) 59.825,-66.35 v2(59.85,-66.375) 59.875,-66.4 v2(70.225,-66.4)
  Bottom Layer w0.2: v2(70.225,-66.4) 70.23,-66.405 70.825,-66.405 73.7,-69.28 73.7,-84.275 77.35,-87.925 79.65,-87.925 82.942,-91.217 82.942,-93.058 J4.3@81.73,-94.27
EXT_1: J20.4 U2.12 | length 13.4
  Top Layer w0.15: U2.12@52.935,-68.325 54,-68.325 54.152,-68.477 54.152,-69.2 54.154,-69.202 54.154,-70.698 54.152,-70.7 54.152,-74.152 J20.4@58.73,-78.73
EXT_2: J20.5 U2.13 | length 17.8
  Top Layer w0.15: U2.13@52.935,-67.675 53.99,-67.675 54.429,-68.114 54.429,-69.085 54.431,-69.087 54.431,-70.813 54.429,-70.815 54.429,-72.229 59.975,-77.775 59.975,-80.175 61.07,-81.27 J20.5@61.27,-81.27
EXT_3: J20.6 U7.3 | length 16.1
  Top Layer w0.15: U7.3@57.065,-67.025 55.725,-67.025 54.803,-67.947 54.803,-71.853 61.27,-78.32 J20.6@61.27,-78.73
EXT_4: J20.7 U7.4 | length 20
  Top Layer w0.15: U7.4@57.065,-67.675 55.475,-67.675 55.1,-68.05 55.1,-71.7 56.3,-72.9 57.875,-72.9 62.55,-77.575 62.55,-80.175 63.645,-81.27 J20.7@63.81,-81.27
EXT_5: J20.8 U7.5 | length 16.8
  Top Layer w0.15: U7.5@57.065,-68.325 55.575,-68.325 55.398,-68.502 55.398,-71.548 56.45,-72.6 58.8,-72.6 63.81,-77.61 J20.8@63.81,-78.73
EXT_6: J20.9 U7.6 | length 20.2
  Top Layer w0.15: U7.6@57.065,-68.975 55.749,-68.975 55.675,-69.049 55.675,-71.375 56.55,-72.25 59.925,-72.25 65.1,-77.425 65.1,-80.2 66.297,-81.397 J20.9@66.35,-81.397
FAN_OUT: FAN_OUT.2 U5.3 | length 13.3
  Top Layer w0.23: FAN_OUT.2@4.985,-64.005 7.68,-64.005 10.7,-67.025 U5.3@17.065,-67.025